# Altium PCB AltiumSTM32_PCB.PcbDoc
Units mm, origin at the board's own origin, x right, y up, seen from the top; angles counter-clockwise.
Board outline 36.77 x 37.27 mm, 4 copper layers (L1(Signal), L2(Gnd), L3(GND), L4(Signal Layer)), stack 1.57 mm thick; 35 components, 27 nets, 170 pads, 133 vias.
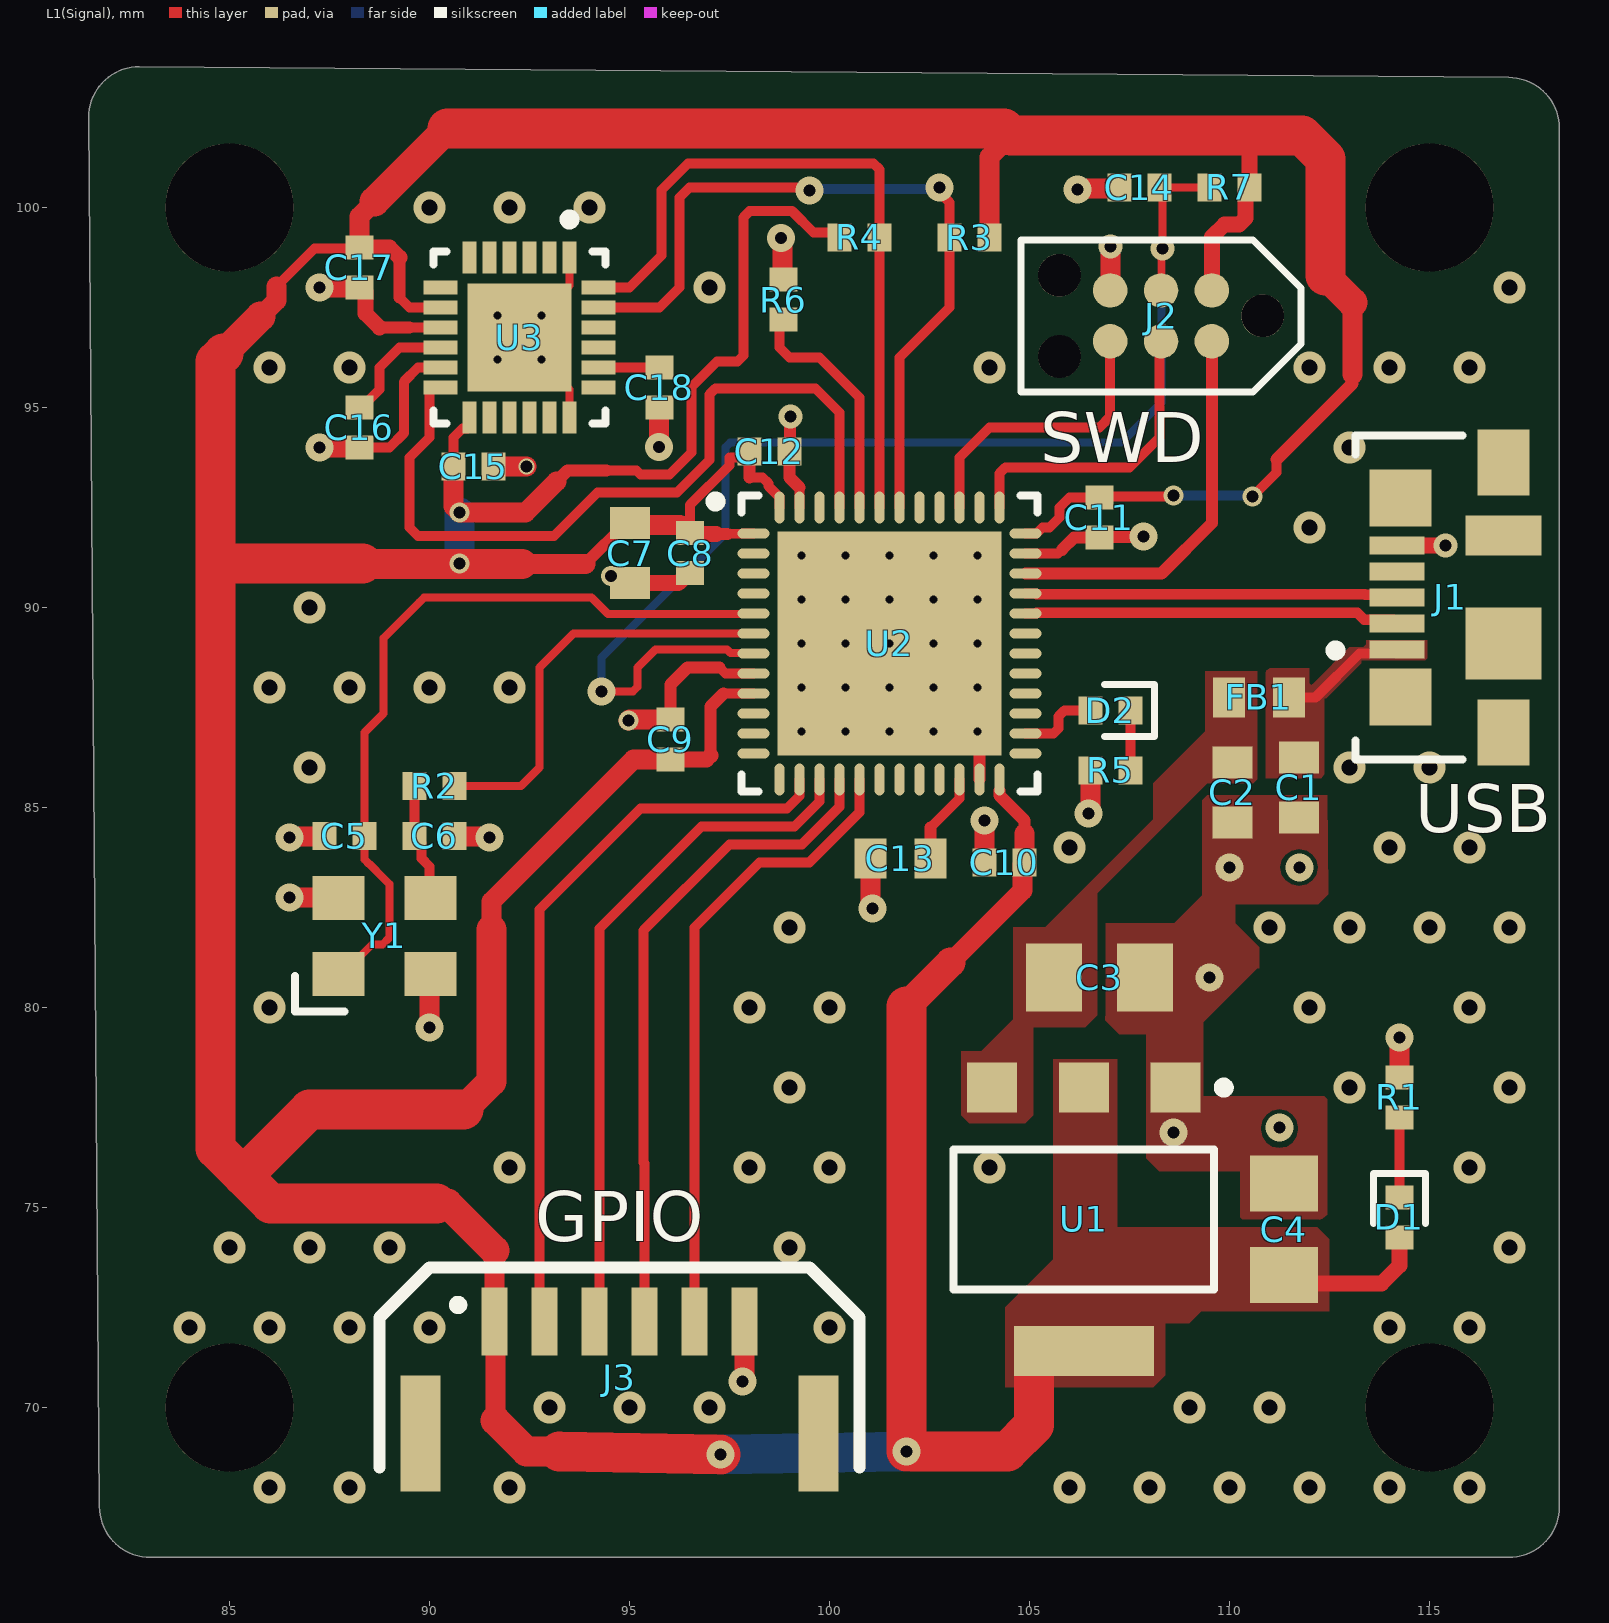
[diagram p0: L1(Signal) view]
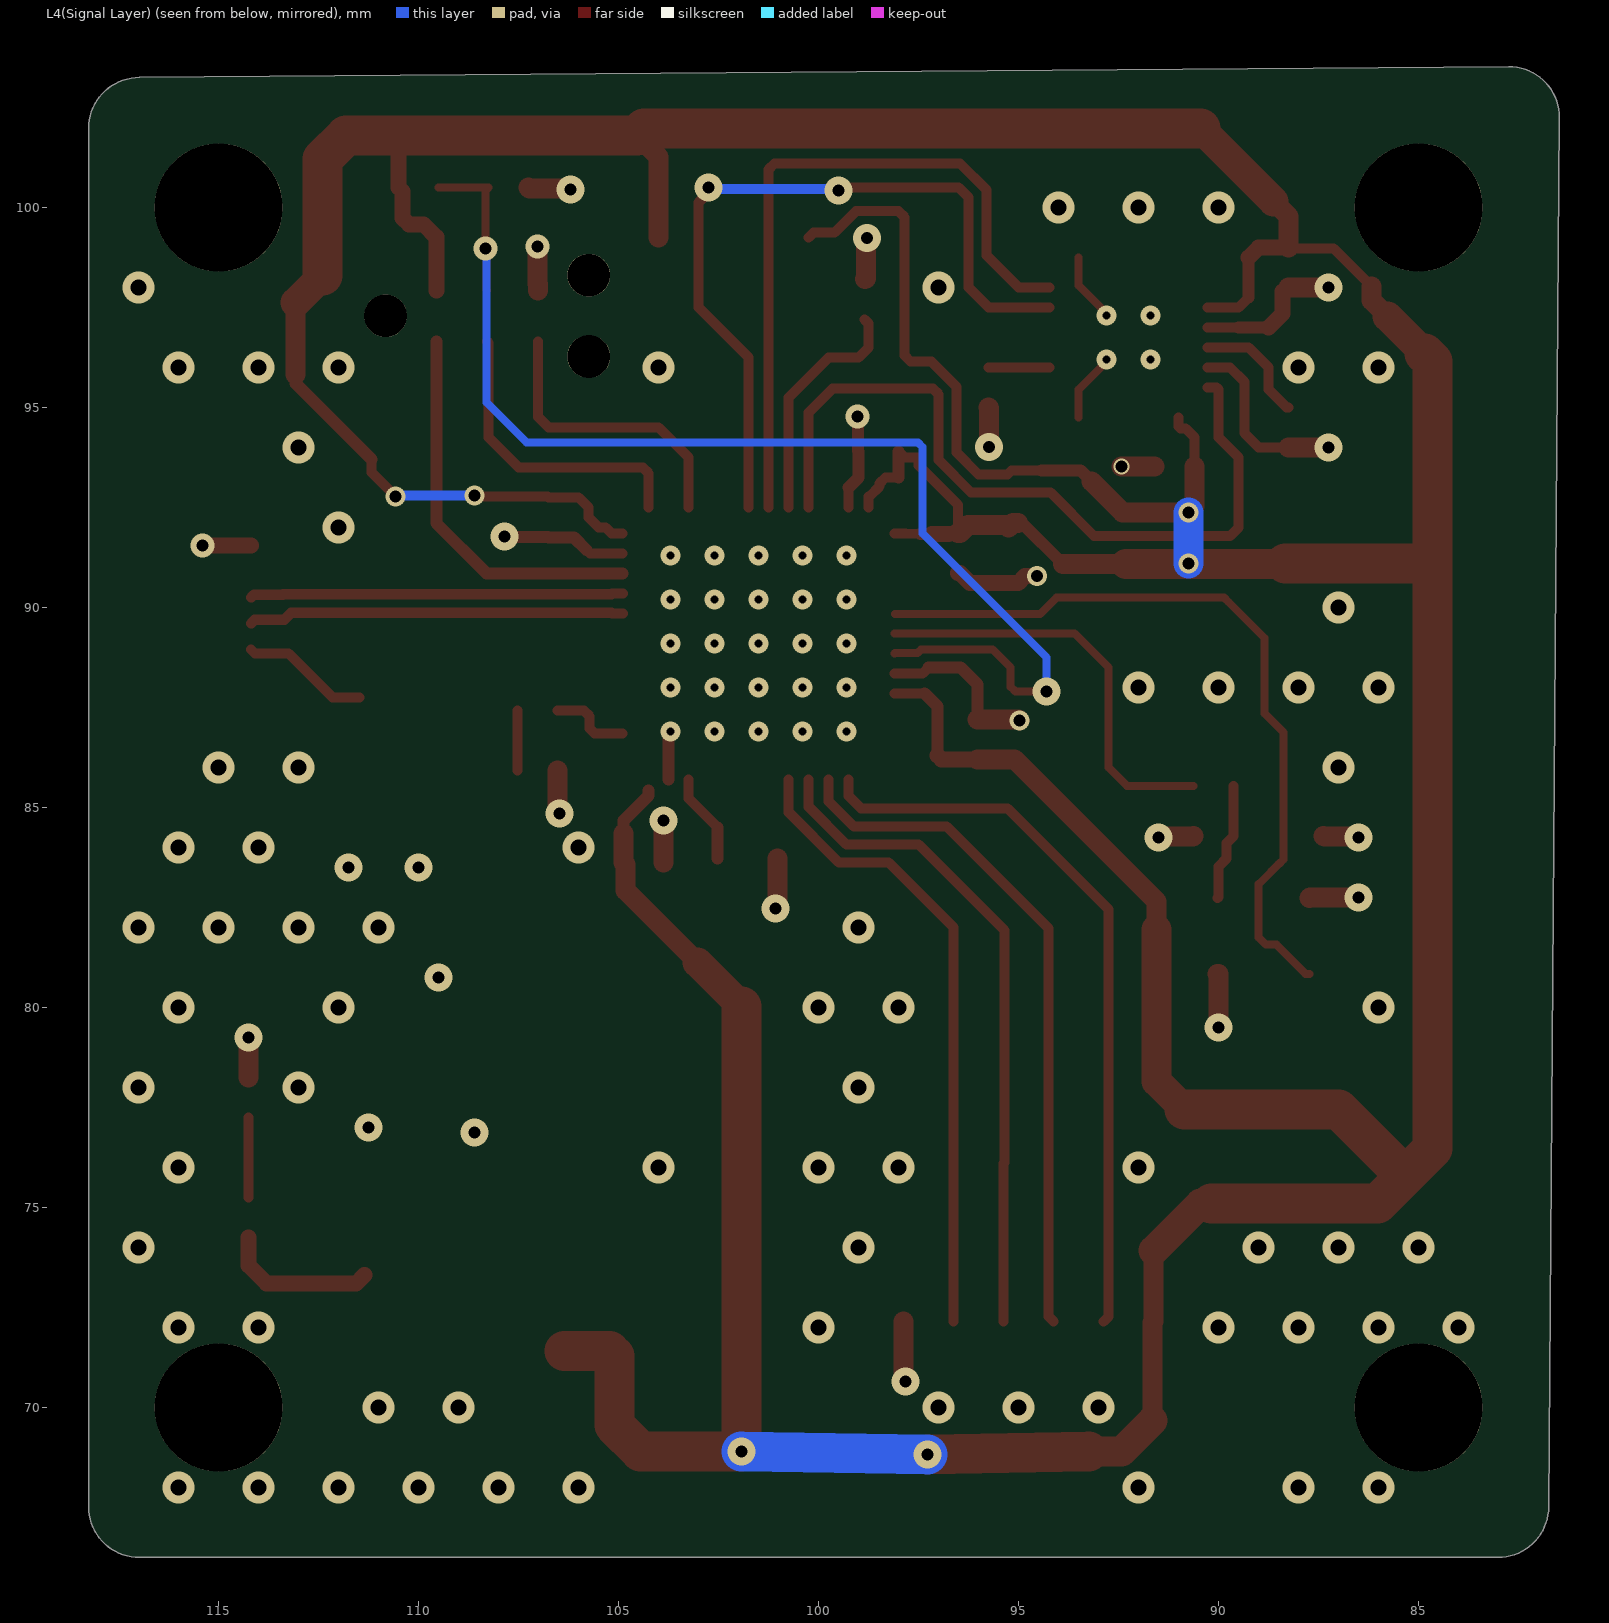
[diagram p1: L4(Signal Layer) view, seen from below]
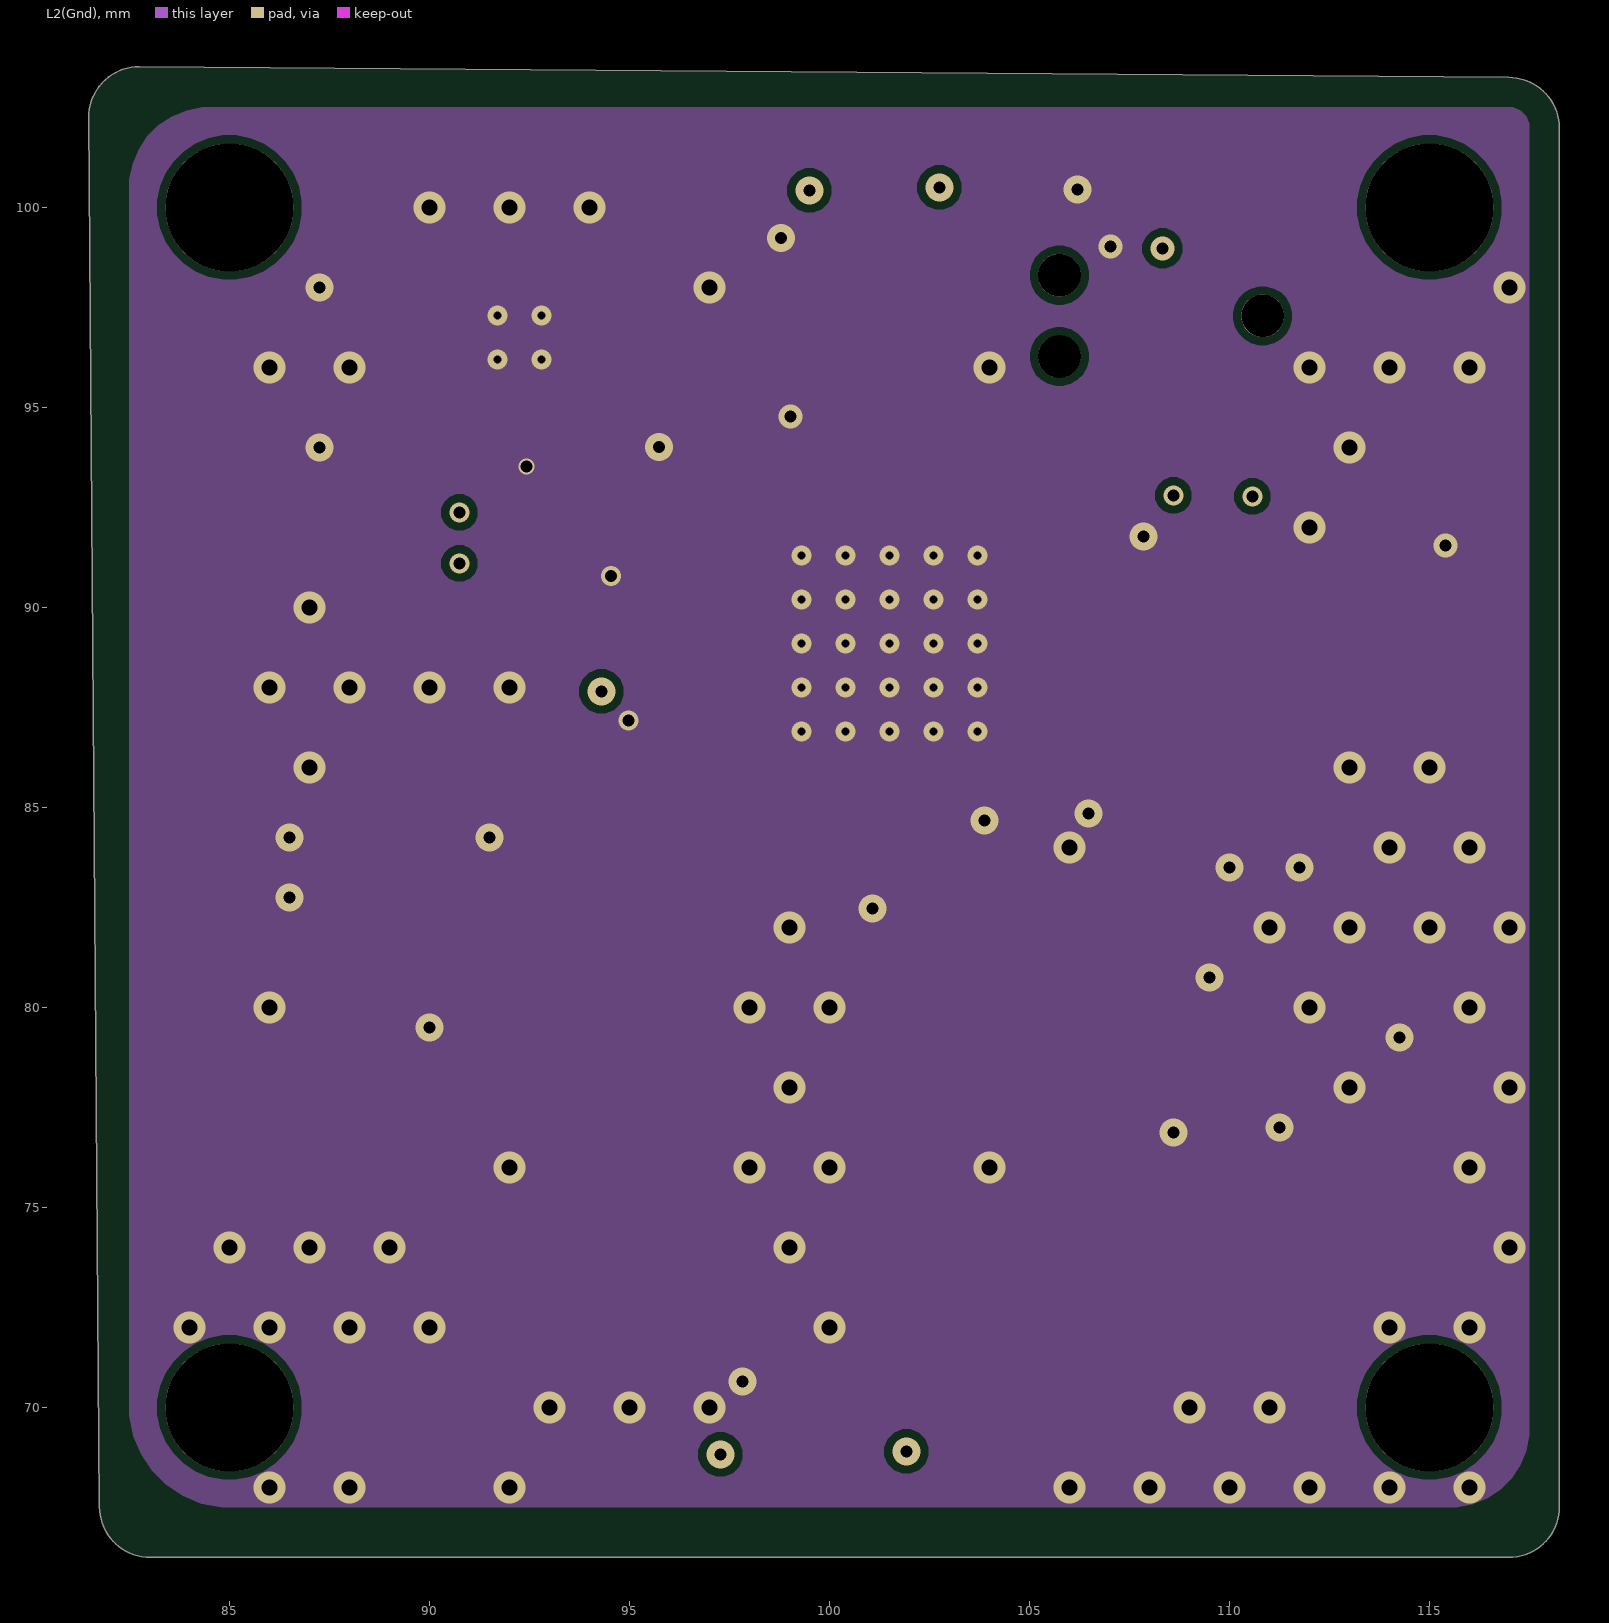
[diagram p2: L2(Gnd)]
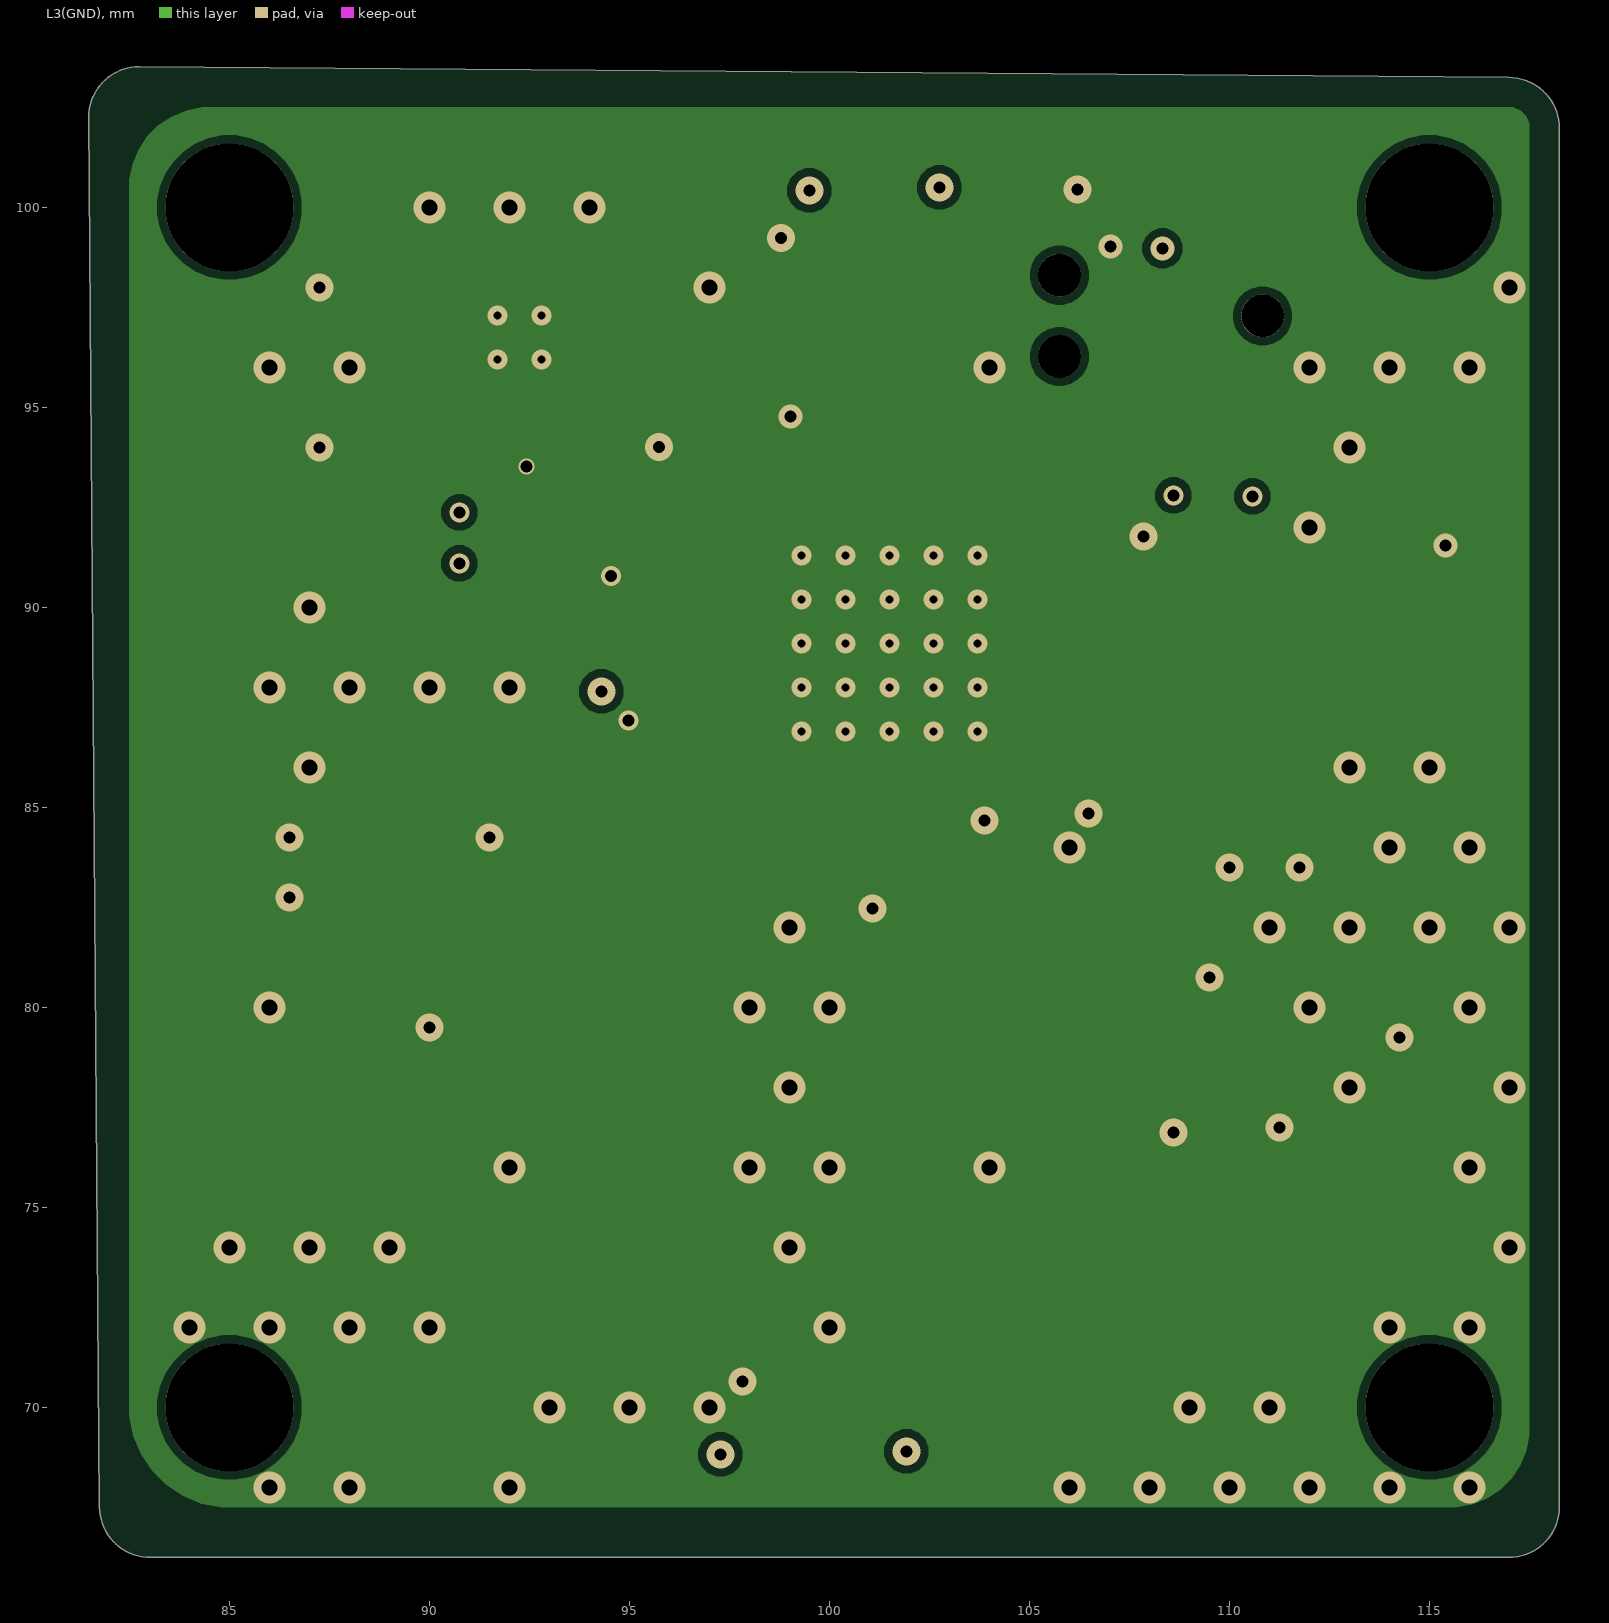
[diagram p3: L3(GND)]
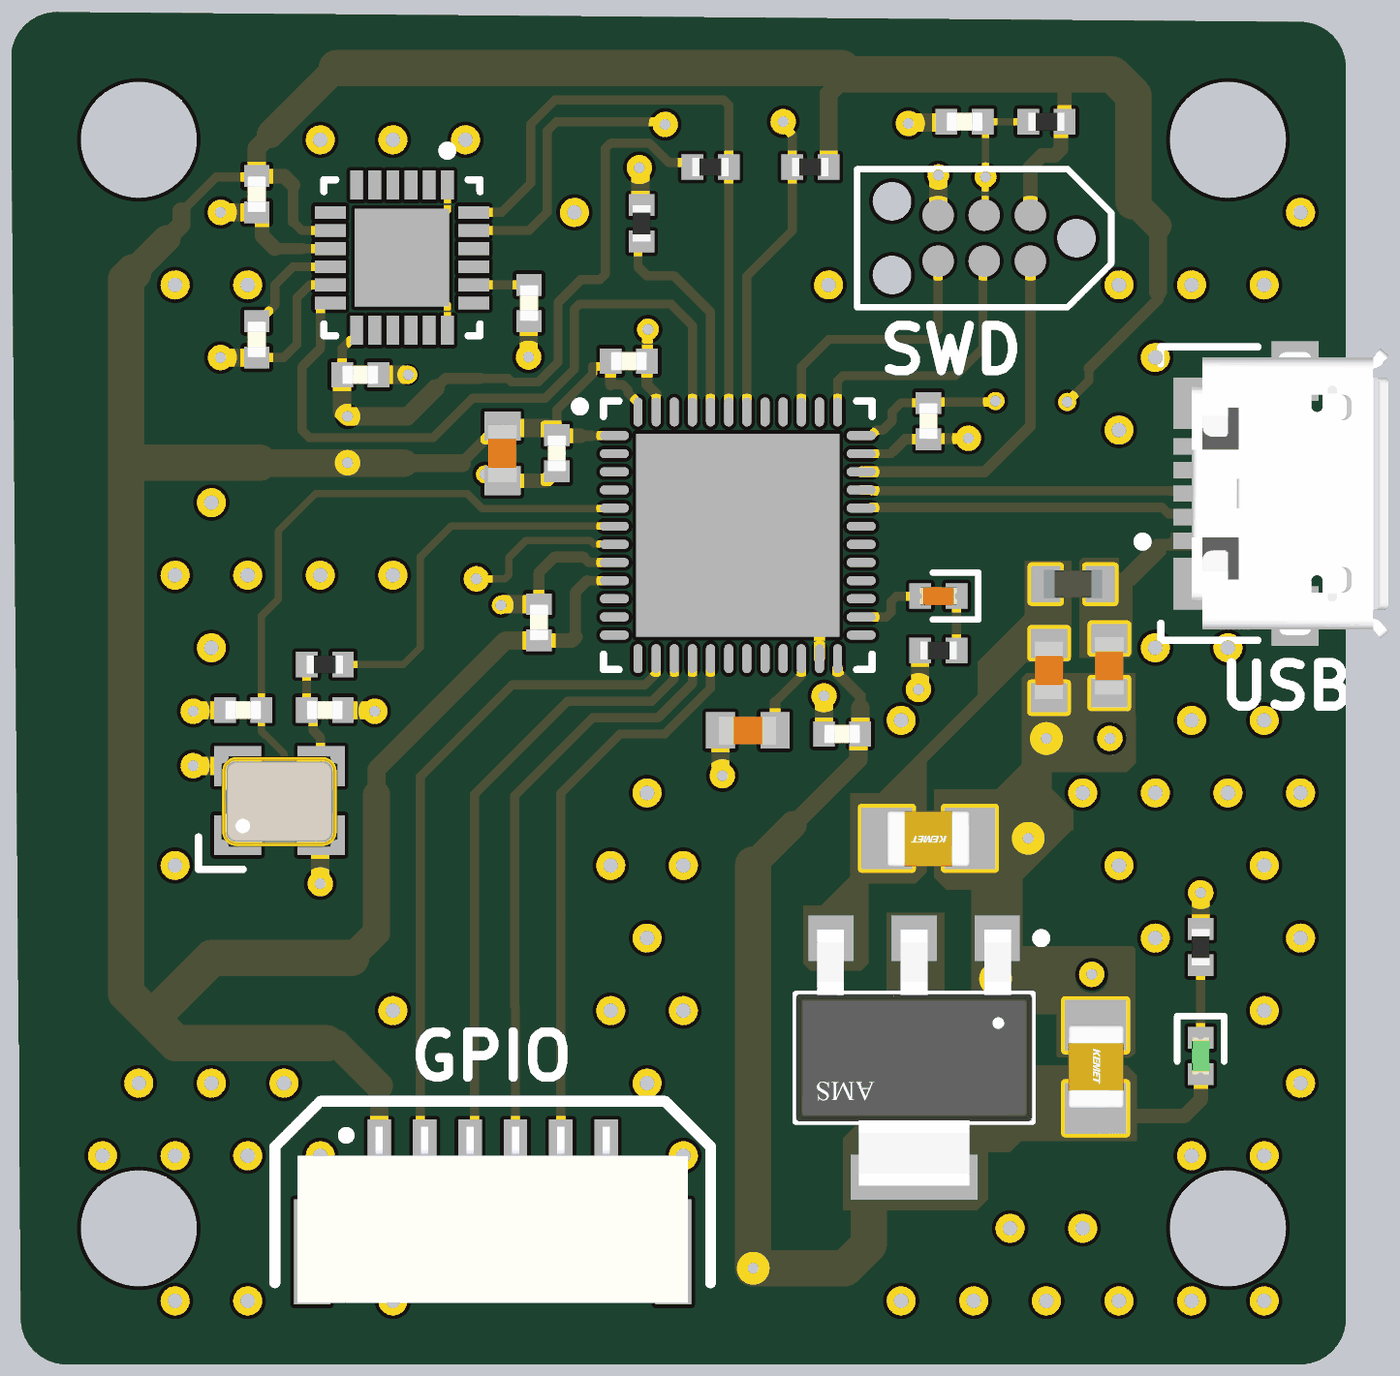
[diagram p4: 3D render of the assembled board from above, using the file's embedded part models]

## Layer stack, top to bottom
Top Solder: solder mask 0.0254, SM-001, Dk 4
L1(Signal): signal copper 0.035
Dielectric 1: prepreg 0.2, PP-017, Dk 4.6
L2(Gnd): signal copper 0.0175
Dielectric 3: core 1.065, Core-039, Dk 4.6
L3(GND): signal copper 0.0175
Dielectric 5: prepreg 0.2, PP-017, Dk 4.6
L4(Signal Layer): signal copper 0.035
Bottom Solder: solder mask 0.0254, SM-001, Dk 4

## Board outline
81.75,67.52 81.48,102.25 cw(c82.75,102.25) 82.75,103.52 116.98,103.25 cw(c116.98,101.98) 118.25,101.98 118.25,67.52 cw(c116.98,67.52) 116.98,66.25 83.02,66.25 cw(c83.02,67.52)

## Design rules (kind name [scope] priority, off if disabled: settings)
Clearance [All] p1: gap=0.2 ignorepadtopadclearanceinfootprint=TRUE
DiffPairsRouting [All] p1: maxlimit=0.203 minlimit=0.203 mostfreqgap=0.203 toplayer_minwidth=0.26 toplayer_maxwidth=0.26 toplayer_prefwidth=0.26 bottomlayer_minwidth=0.26 bottomlayer_maxwidth=0.26 bottomlayer_prefwidth=0.26 impedanceprofiledriven=TRUE impedanceprofileid={3A24E842-7AF0-4169-98C6-8D911C4B3F8E} impedanceprofilevalue=90.000000 maxuncoupledlength=12.7
PolygonConnect [All] p1: connectstyle=Direct reliefconductorwidth=0.254 reliefentries=4 polygonreliefangle="90 Angle" airgapwidth=0.254
RoutingVias [All] p1: holewidth=0.3 width=0.7 viastyle="Through Hole" minholewidth=0.25 minwidth=0.55 maxholewidth=0.4 maxwidth=0.9
SolderMaskExpansion [All] p1: expansion=0.102 istentingtop=FALSE
SupplyNets "Schematic Supply Nets_3" [InNet('VBUS')] p1: voltage=0.000
SupplyNets "Schematic Supply Nets_2" [InNet('+3V3')] p2: voltage=0.000
SupplyNets "Schematic Supply Nets_1" [InNet('GND')] p3: voltage=0.000
SupplyNets "Schematic Supply Nets" [InNet('+5V')] p4: voltage=0.000
UnRoutedNet [All] p1: checkbadconnections=TRUE
Width [All] p1: maxlimit=1 minlimit=0.2 preferedwidth=0.254 midlayer1_minwidth=0.254 midlayer1_maxwidth=0.254 midlayer2_minwidth=0.254 midlayer2_maxwidth=0.254 minimp=50.000000 maximp=50.000000 favimp=50.000000
28 further rules are at their usual default settings.

## Classes and differential pairs
differential pair class DIFF_USB: USB_D
differential pair USB_D: +USB_D_P -USB_D_N

## Components (designator, comment, footprint, x,y, rotation, side; value= is the part's Value field where it differs from the comment)
C1 "2u2" CAP_0603 111.734,85.504 r90 top
C2 "2u2" CAP_0603 110.075,85.375 r90 top
C3 "22u" CAP_0805 106.75,80.75 r180 top
C4 "22u" CAP_0805 111.357,74.452 r270 top
C5 "10p" CAP_0402 87.874,84.287 r0 top
C6 "10p" CAP_0402 90.124,84.287 r180 top
C7 "2u2" CAP_0603 95.016,91.358 r90 top
C8 "100n" CAP_0402 96.516,91.358 r90 top
C9 "100n" CAP_0402 96.025,86.7 r270 top
C10 "100n" CAP_0402 104.375,83.625 r0 top
C11 "100n" CAP_0402 106.75,92.25 r90 top
C12 "100n" CAP_0402 98.5,93.9 r180 top
C13 "2u2" CAP_0603 101.775,83.725 r0 top
C14 "100n" CAP_0402 107.75,100.5 r0 top
C15 "100n" CAP_0402 91.1,93.525 r180 top
C16 "100n" CAP_0402 88.25,94.5 r90 top
C17 "10n" CAP_0402 88.25,98.5 r90 top
C18 "2n2" CAP_0402 95.75,95.5 r90 top
D1 "GREEN" LED_0402_GREEN 114.25,74.75 r90 top
D2 "RED" LED_0402_RED 107.025,87.425 r0 top
FB1 "FB0603" FB_0603 110.734,87.754 r180 top
J1 "473460001" FP-473460001-MFG 116.5,90.25 r90 top
J2 "TC2030-NL" TC2030-NL-FP 108.288,97.29 r180 top
J3 "SM06B-GHS-TB" SM06B-GHS-TB 94.75,70.75 r0 top
R1 "1k" RES_0402 114.25,77.75 r270 top
R2 "0R" RES_0402 90.124,85.537 r0 top
R3 "2k2" RES_0402 103.5,99.25 r0 top
R4 "2k2" RES_0402 100.75,99.25 r180 top
R5 "1k" RES_0402 107.025,85.925 r180 top
R6 "10K" RES_0402 98.85,97.696 r90 top
R7 "10K" RES_0402 110,100.5 r180 top
U1 "AMS1117-3.3" FP-AMS1117-IPC_C 106.357,74.702 r270 top
U2 "STM32F411CEU6" STM-UFQFPN48_L 101.5,89.1 r0 top
U3 "MPU-6050" IS-QFN-24_V 92.25,96.75 r270 top
Y1 "24MHz" XTAL_3225 88.874,81.787 r0 top

## Footprints (in the part's own frame and the unit in brackets; to place one, negate y for a bottom-side part, rotate by r counter-clockwise, add the part's x,y. Pads: shape width x height; smd on the part's side, far side on the other; paste and mask are expansions set on the pad)
CAP_0402 [mm]
  rect 0.6x0.7 smd: 1(-0.5,0) 2(0.5,0)
  body extent -0.5,-0.26 0.5,0.26, height 0.37
CAP_0603 [mm]
  rect 0.8x1 smd: 1(-0.75,0) 2(0.75,0)
  body extent -0.8,-0.4 0.8,0.4, height 0.51
CAP_0805 [mm]
  rect 1.4x1.7 smd: 1(-1.143,0) 2(1.143,0)
  body extent -1.15,-0.76 1.15,0.79, height 1.01
FB_0603 [mm]
  rect 0.8x1 smd: 1(-0.75,0) 2(0.75,0)
  body extent -0.8,-0.4 0.8,0.4, height 0.81
FP-473460001-MFG [mm]
  rect 0.45x1.38 smd paste+0 mask+0: 1(-1.3,2.31) 2(-0.65,2.31) 3(0,2.31) 4(0.65,2.31) 5(1.3,2.31)
  rect 1.425x1.55 smd paste+0 mask+0: 6(-2.488,2.225) 7(2.488,2.225)
  rect 1.65x1.3 smd paste+0 mask+0: 8(-3.375,-0.35) 11(3.375,-0.35)
  rect 1.8x1.9 smd paste+0 mask+0: 9(-1.15,-0.35)
  rect 1x1.9 smd paste+0 mask+0: 10(1.55,-0.35)
  silkscreen extent -4.05,0.67 4.05,3.97, body extent -4.3,-2.48 4.3,3.45, height 0.25
FP-AMS1117-IPC_C [mm]
  rect 1.25x1.25 smd paste+0 mask+0: 1(-3.295,2.29) 2(-3.295,0) 3(-3.295,-2.29)
  rect 1.25x3.5 smd paste+0 mask+0: 4(3.295,0)
  silkscreen extent -3.42,-3.25 1.75,3.63, body extent -3.9,-3.35 3.9,3.35, height 0.25
IS-QFN-24_V [mm] "QFN, 24-Leads, Body 4x4mm, Pitch 0.5mm, Thermal Pad 2.7x2.6mm"
  rect 0.8x0.35 smd: 1(-2,1.25) 2(-2,0.75) 3(-2,0.25) 4(-2,-0.25) 5(-2,-0.75) 6(-2,-1.25) 13(2,-1.25) 14(2,-0.75) 15(2,-0.25) 16(2,0.25) 17(2,0.75) 18(2,1.25)
  rect 0.35x0.85 smd mask+0.102: 7(-1.25,-1.975) 8(-0.75,-1.975) 9(-0.25,-1.975) 10(0.25,-1.975) 11(0.75,-1.975) 12(1.25,-1.975) 19(1.25,1.975) 20(0.75,1.975) 21(0.25,1.975) 22(-0.25,1.975) 23(-0.75,1.975) 24(-1.25,1.975)
  rect 2.7x2.6 smd: 25(0,0)
  silkscreen extent -3.07,-2.15 2.15,2.15, body extent -2,-2 2,2, height 0.95
LED_0402_GREEN [mm]
  rect 0.6x0.7 smd: A(-0.5,0) K(0.5,0)
  silkscreen extent -0.15,-0.65 1.1,0.65, body extent -0.51,-0.25 0.51,0.25, height 0.45
LED_0402_RED [mm]
  rect 0.6x0.7 smd: A(-0.5,0) K(0.5,0)
  silkscreen extent -0.15,-0.65 1.1,0.65, body extent -0.51,-0.25 0.51,0.25, height 0.45
RES_0402 [mm]
  rect 0.6x0.7 smd: 1(-0.5,0) 2(0.5,0)
  body extent -0.5,-0.25 0.5,0.25, height 0.3
SM06B-GHS-TB [mm]
  rect 0.65x1.7 smd: 1(-3.125,1.4) 2(-1.875,1.4) 3(-0.625,1.4) 4(0.625,1.4) 5(1.875,1.4) 6(3.125,1.4)
  rect 1x2.9 smd: ""(-4.975,-1.4) ""(4.975,-1.4)
  silkscreen extent -6,-2.25 6,2.75, body extent -5.38,-2.8 5.38,2.05, height 4.26
STM-UFQFPN48_L [mm] "QFN, 48-Leads, Body 7.1x7.1mm, Pitch 0.5mm, Thermal Pad 5.6x5.6mm, IPC High Density"
  oval 0.8x0.25 smd: 1(-3.4,2.75) 2(-3.4,2.25) 3(-3.4,1.75) 4(-3.4,1.25) 5(-3.4,0.75) 6(-3.4,0.25) 7(-3.4,-0.25) 8(-3.4,-0.75) 9(-3.4,-1.25) 10(-3.4,-1.75) 11(-3.4,-2.25) 12(-3.4,-2.75) 25(3.4,-2.75) 26(3.4,-2.25) 27(3.4,-1.75) 28(3.4,-1.25) 29(3.4,-0.75) 30(3.4,-0.25) 31(3.4,0.25) 32(3.4,0.75) 33(3.4,1.25) 34(3.4,1.75) 35(3.4,2.25) 36(3.4,2.75)
  oval 0.25x0.8 smd: 13(-2.75,-3.4) 14(-2.25,-3.4) 15(-1.75,-3.4) 16(-1.25,-3.4) 17(-0.75,-3.4) 18(-0.25,-3.4) 19(0.25,-3.4) 20(0.75,-3.4) 21(1.25,-3.4) 22(1.75,-3.4) 23(2.25,-3.4) 24(2.75,-3.4) 37(2.75,3.4) 38(2.25,3.4) 39(1.75,3.4) 40(1.25,3.4) 41(0.75,3.4) 42(0.25,3.4) 43(-0.25,3.4) 44(-0.75,3.4) 45(-1.25,3.4) 46(-1.75,3.4) 47(-2.25,3.4) 48(-2.75,3.4)
  rect 5.6x5.6 smd: 49(0,0)
  silkscreen extent -4.47,-3.7 3.7,3.7, body extent -3.55,-3.55 3.55,3.55, height 0.6
TC2030-NL-FP [mil]
  round 33.98 smd: 1(-50,-25) 2(-50,25) 3(0,-25) 4(0,25) 5(50,-25) 6(50,25)
  round 42.01 hole 42.01 unplated: MH(-100,0) MH(100,-40) MH(100,40)
  silkscreen extent -138,-75 138,75
XTAL_3225 [mm]
  rect 1.3x1.1 smd: 1(-1.15,-0.95) 2(1.15,-0.95) 3(1.15,0.95) 4(-1.15,0.95)
  silkscreen extent -2.23,-1.89 -1,-1, body extent -1.6,-1.28 1.6,1.22, height 0.61

## Part data
C1 C2 C7 C13: library part CAP_0603_16V, "Capacitor SMD 0603 16V"
C3 C4: library part CAP_0805_16V, "Capacitor SMD 0805 16V"
C5 C6 C8 C9 C10 C11 C12 C14 C15 C16 C17 C18: library part CAP_0402_16V, "Capacitor SMD 0402 16V"
D1: library part LED_0402_GREEN, "LED 0402 GREEN SMD"
D2: library part LED_0402_RED, "LED 0402 RED SMD"
FB1: library part FB_0603, "Ferrite Bead SMD 0603"
J1: library part CMP-2000-05246-2, "CONN RCPT USB2.0 MICRO B SMD R/A", Current Rating=1.8A, Manufacturer=Molex, Package=0, Temperature="-30°C to +85°C", Temperature Range High=+85°C, Temperature Range Low=-30°C, Voltage Rating=30V, Automotive=No, Category=Conn, ComponentLink2Description=Datasheet, ComponentLink2URL=https://www.molex.com/webdocs/datasheets/pdf/en-us/0473460001_IO_CONNECTORS.pdf, Conn Orientation="Right Angle", Contact Material=Gold,Nickel, Device Class L1=Connectors, Device Class L2="USB Connectors", Device Class L3=unset, Digikey Description="CONN RCPT USB2.0 MICRO B SMD R/A", Footprint Url=https://www.molex.com/pdm_docs/sd/473460001_sd.pdf, Height=2.945mm, Is Female=yes, Lead Free=Yes, Manufacturer Part Number=473460001, Number Of Contacts=5, Octopart=https://octopart.com/47346-0001-molex-7164928, Pitch=0.65mm, RoHS=TRUE, Shielding=true, Usb Standard="USB 2.0"
J2: "Tag-Connect No-Solder SWD Debug Connector (No Legs) DO NOT PLACE", Manufacturer=Tag-Connect, Manufacturer Part Number=TC2030-NL-FP
J3: "Header Connector 6 Position 1.25MM Pitch SMD Horizontal JST GH", Manufacturer=JST, Manufacturer Part Number=SM06B-GHS-TB
R1 R2 R3 R4 R5 R6 R7: library part RES_0402, "Resistor SMD 0402"
U1: library part CMP-209535-000001-1, "LDO Voltage Regulators 1A, 3.3V", Dropout Voltage=1.1V, Manufacturer="Advanced Monolithic Systems", Max Junction Temp=+125°C, Max Power Dissipation=1.2W, Max Supply Voltage=15V, Nominal Supply Current=5mA, Output Current=1A, Output Voltage=3.3V, Package=AMS1117, Temperature="-40°C to +125°C", Temperature Range Low=-40°C, Automotive=No, Category=IC, ComponentLink2Description=Datasheet, ComponentLink2URL=http://www.advanced-monolithic.com/pdf/ds1117.pdf, Device Class L1="Integrated Circuits (ICs)", Device Class L2="Power Management ICs", Device Class L3="Voltage Regulators - Linear", Height=1.8mm, Ipc Land Pattern Name=SOT229P700X180-4, Lead Free=Yes, Manufacturer Part Number=AMS1117-3.3, Number Of Outputs=1, Octopart=https://octopart.com/ams1117-3.3-advanced+monolithic+systems-25899300, Output Type=Fixed, RoHS=TRUE, Standoff Height=0.64mm, Temperature Range High=+125°C
U2: library part CMP-0243-00165-1, "ARM Cortex-M4 32-bit MCU+FPU, 512 KB Flash, 128 KB RAM, 36 I/Os, 48-Pin UFQFPN, -40 to 85 degC, Tray", I/Os (High Current)=36, Operating Frequency(F) (Processor speed) (MHz)=100, Package Description=UFQFPN48, Package Reference="48-Pin Ultra Thin Fine Pitch Quad Flat No-Lead, 7 x 7 x 0.6 mm Body, 0.5 mm Pitch, Exposed Pad", Supply Voltage(Vcc) min (V)=1.7, ComponentLink1Description="Manufacturer URL", ComponentLink1URL=http://www.st.com/, ComponentLink2Description=Datasheet, ComponentLink2URL=http://www.st.com/st-web-ui/static/active/en/resource/technical/document/datasheet/DM00115249.pdf, Core="ARM Cortex-M4", DatasheetVersion="Rev. 6", FLASH Size (Prog) (kB)=512, Internal RAM Size (kB)=128, Mounting Technology="Surface Mount", Packing=Tray
U3: library part CMP-1753-00002-2, "3-Axis Gyroscope, Accelerometer and a Digital Motion Processor(TM) (DMP), 2.375 to 3.46 V, -40 to 85 degC, 24-Pin QFN, RoHS, Tape and Reel", Manufacturer=InvenSense, Standard Package=5,000, Category=Sensors,Transducers, Datasheet URL=http://datasheet.octopart.com/MPU-6050-InvenSense-datasheet-14421344.pdf, Datasheet Version="Rev. 3.3, 05/2012", Dynamic Catalog=MPU-6000™Series, Family=Multifunction, Featured Product=MPU-60506-Axis,IntegratedI²CSolution, Manufacturer URL=http://www.invensense.com/, Online Catalog=MPU-6000™Series, Other Names="1428-1007-2 / MPU6050", Output Type=Digital, Sensor Type=MotionTracking, Unit PriceUSD=Digital
Y1: library part TSX-3225_24.0000MF15X-AC, "Crystal SMD 24MHz 10PPM 7pF 3225", Load Capacitance=7pF, Manufacturer=Epson, Manufacturer Number="TSX-3225 24.0000MF15X-AC", ESR=40R, Type=XTAL

## Free pads (board coordinates)
  round 3.2 hole 3.2 unplated: 1(115,70) MH(85,70) MH(85,100) MH(115,100)

## Via types
v1: diameter 0.8, hole 0.4, L1(Signal) to L4(Signal Layer), 68 vias
v2: diameter 0.5, hole 0.2, L1(Signal) to L4(Signal Layer), 29 vias
v3: diameter 0.7, hole 0.3, L1(Signal) to L4(Signal Layer), 25 vias
v4: diameter 0.5, hole 0.3, L1(Signal) to L4(Signal Layer), 6 vias
v5: diameter 0.6, hole 0.3, L1(Signal) to L4(Signal Layer), 4 vias
v6: diameter 0.4, hole 0.3, L1(Signal) to L4(Signal Layer), 1 vias

## Nets (pads, with @x,y where several pads share a name; then routed paths per layer and width w, separated by ;. In a path a pad name is that pad's centre, name@x,y a point inside that pad or via, vN(x,y) a via of type N, cw(c..) or ccw(c..) an arc to the next point about the centre after c; other vN are vias at no path point)
+3V3: C4.2 C7.2 C8.2 C9.2 C10.2 C11.2 C12.2 C15.2 C17.2 D1.A J2.1 J3.1 R3.2 R4.2 R7.1 U1.2 U1.4 U2.1 U2.9 U2.24 U2.36 U2.48 U3.8 U3.13 | length 188.4
  L1(Signal) w0.25: 86.175,98.025 87.125,98.975 88.225,98.975 C17.2 ; 89.25,97.75 89.5,97.5 U3.8 ; C15.2 90.6,94.25 90.825,94.475 90.95,94.475 91,94.525 U3.13 ; 94.425,93.425 95.177,93.425 95.277,93.325 96.002,93.325 96.55,93.873 96.55,95.515 97.185,96.15 97.704,96.15 97.85,96.296 97.85,99.754 98.003,99.906 99.068,99.906 99.6,99.374 100.126,99.374 R4.2 ; C8.2 96.516,92.566 97.5,93.55 97.5,93.754 97.854,93.754 C12.2 ; 97.35,87.85 U2.9 ; 97.454,91.843 97.825,91.85 U2.1 ; 98,93.25 98.329,93.25 98.475,93.104 98.475,93.033 98.733,92.775 98.75,92.775 U2.48 ; U2.36 105.175,91.85 105.325,92 105.5,92 105.75,92.25 105.75,92.5 106,92.75 C11.2 106.775,92.775 108.575,92.775 v4(108.6,92.8) ; v4(110.575,92.775) 111.175,93.375 111.175,93.7
  L1(Signal) w0.3: 89.25,97.75 89.25,98.75 ; 93.175,93.15 93.45,93.425 94.425,93.425 ; 93.897,91.089 94.916,92.108 C7.2 ; 97.025,86.3 97.025,87.525 97.35,87.85 ; 97.166,91.843 97.454,91.843 ; 98,93.25 C12.2 ; U2.24@104.25,85.425 104.25,85.3 104.875,84.675 104.875,84.35 ; 111.175,93.7 113.075,95.6 113.075,95.825
  L1(Signal) w0.4: C17.2 89,99 89.25,98.75 ; C9.2 96.925,86.2 97.025,86.3 ; C8.2@96.754,91.843 97.166,91.843 ; J2.1 109.558,99.258 109.875,99.575 110.241,99.575 110.4,99.734 110.4,100.4 R7.1 110.5,102.075 110.525,102.1 ; C4.2 111.566,73.1 113.8,73.1 114.25,73.55 D1.A
  L1(Signal) w0.5: 85.775,97.275 86.175,97.675 86.175,98.025 ; C17.2 88.25,99.775 88.625,100.15 ; C15.2 90.6,92.525 v4(90.75,92.375) 92.4,92.375 93.175,93.15 ; 91.55,81.95 91.55,82.65 95.1,86.2 C9.2 ; 91.625,73.925 J3.1 91.65,72.125 91.65,69.675 ; 92.314,91.089 93.897,91.089 ; C7.2 95.142,92.108 95.25,92 95.25,92.042 95.266,92.058 96.266,92.058 96.466,91.858 C8.2 ; 103.025,81.125 104.825,82.925 104.825,83.575 C10.2 104.875,84.35 ; R3.2 104,101.261 104.539,101.8 ; 113.075,95.825 113.075,97.625
  L1(Signal) w0.75: 84.85,96.35 85.775,97.275 ; 88.325,91.1 88.336,91.089 92.314,91.089 ; 88.625,100.15 90.45,101.975 ; 90.175,75.1 90.45,75.1 91.625,73.925 ; 90.85,77.45 91.55,78.15 91.55,81.95 ; 91.65,69.675 92.425,68.9 93.25,68.9 ; 101.925,80.025 103.025,81.125 ; 112.4,98.3 113.075,97.625
  L1(Signal) w1: 84.85,96.35 84.65,96.15 84.65,91.1 ; 88.325,91.1 84.65,91.1 ; 90.175,75.1 86.025,75.1 85.338,75.788 ; 90.45,101.975 104.364,101.975 104.539,101.8 111.814,101.8 112.4,101.214 112.4,98.3 ; 90.85,77.45 87,77.45 85.338,75.788 ; 93.25,68.9 v3(97.275,68.825) ; 101.925,80.025 v3(101.925,68.9) 104.45,68.9 105.107,69.557 105.107,71.282 105.232,71.407 U1.4 ; 84.65,91.1 84.65,76.475 85.338,75.788
  L4(Signal Layer) w0.25: v4(108.6,92.8) v4@110.575,92.8
  L4(Signal Layer) w0.75: v4(90.75,91.1) v4(90.75,92.375)
  L4(Signal Layer) w1: v3(97.275,68.825) v3(101.925,68.9)
+5V: C2.2 C3.2 FB1.2 U1.3
GND: C1.1 C2.1 C3.1 C4.1 C5.1 C6.1 C7.1 C8.1 C9.1 C10.1 C11.1 C12.1 C13.1 C14.1 C15.1 C16.1 C17.1 C18.1 J1.5 J2.5 J3.6 R1.1 R5.2 R6.2 U1.1 U2.8 U2.23 U2.35 U2.47 U2.49 U3.1 U3.9 U3.11 U3.18 U3.25 Y1.2 Y1.4 | length 41.6
  L1(Signal) w0.2: v2(92.8,96.2) 92.8,96.15 93.5,95.45 U3.18 ; U3.25@92.8,97.35 93.5,98.05 U3.1
  L1(Signal) w0.25: C16.1 89,94 89.358,94.358 89.358,95.642 89.715,96 U3.11 ; 89.5,97 U3.9 ; v6(92.425,93.525) v6@92.454,93.554 ; 97.25,88.5 97.4,88.35 U2.8 ; U2.47 99.25,93 ; U2.35 105.715,91.35 105.808,91.442
  L1(Signal) w0.3: 88.75,97 89.5,97 ; C9.1 96.025,88.075 96.45,88.5 97.25,88.5 ; R6.2@98.837,98.208 R6.2 ; v5(99.025,94.775) 99.012,94.763 99.012,93.912 C12.1 99,93.25 99.25,93 ; v2(103.7,86.9) 103.75,86.85 U2.23 ; 105.808,91.442 106.115,91.75 C11.1 106.762,91.763 107.838,91.763 v3(107.85,91.775)
  L1(Signal) w0.4: C17.1@88.3,98 88.4,97.9 88.4,97.35 88.75,97 ; v4(94.537,90.781) 94.843,90.781 C7.1 96.216,90.608 96.466,90.858 C8.1 ; J1.5 v5(115.4,91.55)
  L1(Signal) w0.5: v3(86.5,82.75) 86.506,82.744 87.718,82.744 Y1.4 ; v3(86.5,84.25) 86.519,84.269 87.356,84.269 C5.1 ; v3(87.25,94) C16.1 ; v3(87.25,98) C17.1 ; v3(90,79.5) 90,80.813 cw(c90.024,80.813) Y1.2 ; C6.1 90.643,84.269 91.481,84.269 v3(91.5,84.25) ; C15.1 v6(92.425,93.525) ; v4(94.975,87.175) 95,87.2 C9.1 ; v3(95.736,94.014) 95.743,94.021 95.743,94.993 C18.1 ; v3@97.85,70.675 v3(97.825,70.65) ccw(c97.825,70.7) 97.875,70.7 J3.6 ; v3(98.789,99.231) 98.819,99.201 98.819,98.226 R6.2@98.837,98.208 ; C13.1 101.025,82.525 ccw(c101.075,82.525) v3(101.075,82.475) ; C10.1 v3(103.875,84.675) ; v3(106.2,100.45) 106.225,100.475 107.225,100.475 C14.1 ; v3(106.475,84.85) ccw(c106.475,84.9) 106.525,84.9 R5.2 ; J2.5 107.018,98.086 107.025,98.093 v5(107.025,99.025) ; v3@111.25,76.946 v3(111.25,77) ; v3@111.734,83.5 v3(111.75,83.5) ; R1.1 v3(114.25,79.25)
  other v1: 86,68 88,68 92,68 106,68 108,68 110,68 112,68 114,68 116,68 93,70 95,70 97,70 109,70 111,70 84,72 86,72 88,72 90,72 100,72 114,72 116,72 85,74 87,74 89,74 99,74 117,74 92,76 98,76 100,76 104,76 116,76 99,78 113,78 117,78 86,80 98,80 100,80 112,80 116,80 99,82 111,82 113,82 115,82 117,82 106,84 114,84 116,84 87,86 113,86 115,86 86,88 88,88 90,88 92,88 87,90 112,92 113,94 86,96 88,96 104,96 112,96 114,96 116,96 97,98 117,98 90,100 92,100 94,100
  other v2: 99.3,86.9 100.4,86.9 101.5,86.9 102.6,86.9 99.3,88 100.4,88 101.5,88 102.6,88 103.7,88 99.3,89.1 100.4,89.1 101.5,89.1 102.6,89.1 103.7,89.1 99.3,90.2 100.4,90.2 101.5,90.2 102.6,90.2 103.7,90.2 99.3,91.3 100.4,91.3 101.5,91.3 102.6,91.3 103.7,91.3 91.7,96.2 91.7,97.3 92.8,97.3
  other v3: 108.6,76.875 109.5,80.75 110,83.5
IMU_CPOUT: C18.2 U3.20 | length 1.5
  L1(Signal) w0.25: U3.20 C18.2
IMU_INT: U2.45 U3.12 | length 19.9
  L1(Signal) w0.25: U3.12 90.05,95.5 90,95.45 90,94.25 89.5,93.75 89.5,92 89.711,91.789 93.114,91.789 94.2,92.875 96.189,92.875 97,93.686 97,95.329 97.146,95.475 99.65,95.475 100.25,94.875 U2.45
IMU_REGOUT: C16.2 U3.10 | length 3
  L1(Signal) w0.25: C16.2 88.3,95 88.75,95.45 88.75,96 89.25,96.5 U3.10
IMU_SCL: R3.1 U2.42 U3.23 | length 19.8
  L1(Signal) w0.25: U3.23 95.75,97.5 96.25,98 96.25,100.25 96.5,100.5 99.425,100.5 v3(99.5,100.425) ; U2.42 101.75,96.25 103,97.5 R3.1 103,100.128 102.75,100.378 v3(102.75,100.5)
  L4(Signal Layer) w0.25: v3(99.5,100.425) 99.537,100.462 102.712,100.462 v3(102.75,100.5)
IMU_SDA: R4.1 U2.43 U3.24 | length 17.8
  L1(Signal) w0.25: U3.24 95,98 95.8,98.8 95.8,100.436 96.464,101.1 101.104,101.1 101.25,100.954 R4.1 U2.43
LED_PWR_K: D1.K R1.2 | length 2
  L1(Signal) w0.25: D1.K R1.2
MCU_BOOT0: R6.1 U2.44 | length 6
  L1(Signal) w0.25: R6.1 98.75,97.096 98.75,96.5 99,96.25 99.75,96.25 100.75,95.25 U2.44
MCU_LED_A: D2.A U2.26 | length 2
  L1(Signal) w0.25: U2.26 105.6,86.85 105.725,86.975 105.725,87.279 105.871,87.425 D2.A
MCU_LED_K: D2.K R5.1 | length 1.5
  L1(Signal) w0.25: R5.1 D2.K
MCU_NRST: C14.2 J2.3 R7.2 U2.7 | length 31
  L1(Signal) w0.2: v3(94.3,87.9) 95.083,87.9 95.2,88.017 95.2,88.5 95.65,88.95 97.436,88.95 97.527,88.86 98.09,88.86 U2.7 ; J2.3 108.307,97.943 108.307,98.957 v5(108.325,98.975) 108.325,100.425 C14.2 R7.2
  L4(Signal Layer) w0.2: v3(94.3,87.9) 94.3,88.75 97.4,91.85 97.4,94.008 97.517,94.125 107.3,94.125 108.3,95.125 108.3,98.95 v5(108.325,98.975)
MCU_OSC_IN: C5.2 U2.5 Y1.1 | length 19.4
  L1(Signal) w0.2: Y1.1 87.824,80.837 88.557,81.57 88.82,81.57 89,81.75 89,83.083 88.674,83.408 88.674,83.412 88.499,83.587 88.492,83.587 88.374,83.705 C5.2 88.374,86.876 88.849,87.351 88.849,89.232 89.75,90.133 89.867,90.25 94.05,90.25 94.461,89.839 97.779,89.839 97.78,89.84 U2.5@98.088,89.84
MCU_OSC_OUT: R2.2 U2.6 | length 10.5
  L1(Signal) w0.2: R2.2 92.287,85.537 92.75,86 92.75,88.5 93.6,89.35 U2.6
MCU_PA4: J3.2 U2.14 | length 18.4
  L1(Signal) w0.25: J3.2 92.75,72.275 92.75,82.45 95.275,84.975 98.936,84.975 99.25,85.289 U2.14
MCU_PA5: J3.3 U2.15 | length 17.2
  L1(Signal) w0.25: J3.3 94.25,72.275 94.25,81.975 96.8,84.525 99.123,84.525 99.75,85.152 U2.15
MCU_PA6: J3.4 U2.16 | length 16.6
  L1(Signal) w0.25: J3.4 95.375,76.104 95.354,76.125 95.354,81.929 97.5,84.075 99.309,84.075 100.25,85.016 U2.16
MCU_PA7: J3.5 U2.17 | length 16
  L1(Signal) w0.25: J3.5 96.625,82 98.25,83.625 99.496,83.625 100.75,84.879 U2.17
MCU_SWCLK: J2.4 U2.37 | length 7.6
  L1(Signal) w0.25: U2.37 104.25,93.104 104.25,93.354 104.396,93.5 107.5,93.5 108.25,94.25 108.25,96.617 J2.4
MCU_SWDIO: J2.2 U2.34 | length 9.7
  L1(Signal) w0.3: U2.34 108.3,90.85 109.558,92.108 J2.2
MCU_SWO: J2.6 U2.39 | length 7.3
  L1(Signal) w0.25: U2.39 103.25,93.75 104,94.5 106.75,94.5 107.018,94.768 J2.6
MCU_VCAP1: C13.2 U2.22 | length 2.3
  L1(Signal) w0.25: 102.525,84.5 103.25,85.225 U2.22
  L1(Signal) w0.3: C13.2 102.525,84.5
USB_D_N: J1.2 U2.32 | length 9.4
  L1(Signal) w0.26: U2.32 105.165,89.85 105.183,89.868 113.19,89.868 113.363,89.695 114.095,89.695 J1.2
USB_D_P: J1.3 U2.33 | length 9.3
  L1(Signal) w0.26: U2.33 105.165,90.35 105.183,90.332 113.382,90.332 113.392,90.322 114.118,90.322 J1.3
VBUS: C1.2 FB1.1 J1.1 | length 3.2
  L1(Signal) w0.25: FB1.1 112.154,87.754 113.25,88.85 114.09,88.85 J1.1
XTAL_IN: C6.2 R2.1 Y1.3 | length 3
  L1(Signal) w0.25: R2.1 C6.2 89.799,84.112 89.799,83.728 90,83.528 90,82.762 Y1.3
pads on no net: J1.4 J1.6 J1.7 J1.8 J1.9 J1.10 J1.11 J2.MH J3. U2.2 U2.3 U2.4 U2.10 U2.11 U2.12 U2.13 U2.18 U2.19 U2.20 U2.21 U2.25 U2.27 U2.28 U2.29 U2.30 U2.31 U2.38 U2.40 U2.41 U2.46 U3.2 U3.3 U3.4 U3.5 U3.6 U3.7 U3.14 U3.15 U3.16 U3.17 U3.19 U3.21 U3.22

## Polygon pours and split planes (outlines as drawn)
VBUS on L1(Signal) "VBUS_L01_P020" (solid, pour order 20): 113.425,89.2 113.425,89.075 113.35,89 113,89 112.05,88.05 112,88.1 112,88.475 110.95,88.475 110.925,88.5 110.9,88.475 110.9,85.725 112.375,85.725 112.425,85.775 112.375,85.825 112.375,87.725 112.425,87.725 113.325,88.625 114.85,88.625 114.95,88.725 114.95,89.2
GND on L1(Signal) "GND_L01_P019" (solid, pour order 19): 112.45,85.3 109.325,85.3 109.325,82.8 108.625,82.1 106.9,82.1 106.9,79.675 107.25,79.325 107.925,79.325 107.925,76.225 108.25,75.9 110.275,75.9 110.275,74.75 110.425,74.6 112.45,74.6 112.45,77.7 112.375,77.775 109.35,77.775 109.35,79.625 110.7,80.975 110.75,80.975 110.75,81.5 110.15,82.1 110.15,82.575 112.225,82.575 112.475,82.825
+3V3 on L1(Signal) "+3V3_L01_P006" (solid, pour order 6): 105.6,78.7 105.6,73.7 104.4,72.5 104.4,70.5 108.1,70.5 108.4,70.8 108.4,72.1 109,72.1 109.3,72.4 112.5,72.4 112.5,74.2 112.2,74.5 107.2,74.5 107.2,78.7 106.7,78.7
+5V on L1(Signal) "+5V_L01_P004" (solid, pour order 4): 108.1,85.6 108.1,84.7 105.4,82 104.6,82 104.6,79.7 103.8,78.9 103.3,78.9 103.3,77.3 103.5,77.1 104.9,77.1 105.1,77.3 105.1,79.5 106.4,79.5 106.7,79.8 106.7,82.85 109.45,85.6 110.6,85.6 110.7,85.7 110.7,88.4 109.4,88.4 109.4,86.9
GND on L2(Gnd) "GND_L02_P007" (solid, pour order 7): 82.5,70.04 ccw(c85.04,70.04) 85.04,67.5 115.5,67.5 ccw(c115.5,69.5) 117.5,69.5 117.5,102 ccw(c117,102) 117,102.5 84.5,102.5 ccw(c84.5,100.5) 82.5,100.5 82.5,88.5
GND on L3(GND) "GND_L03_P009" (solid, pour order 9): 82.5,70.04 ccw(c85.04,70.04) 85.04,67.5 115.5,67.5 ccw(c115.5,69.5) 117.5,69.5 117.5,102 ccw(c117,102) 117,102.5 84.5,102.5 ccw(c84.5,100.5) 82.5,100.5 82.5,88.5

## Silkscreen, mask and mechanical layers (free items; w line width, h text height)
Top Overlay:
  text "SWD" at 105.275,93.625 h1.25
  text "USB" at 114.65,84.375 h1.2
  text "GPIO" at 92.638,74.154 h1.25
Mechanical 1:
  the board outline again, w0.254